# Altium PCB BABA03A.PcbDoc (part 1 of 2)
Units mm, origin at the board's own origin, x right, y up, seen from the top; angles counter-clockwise.
Board outline 201.01 x 71.02 mm, 2 copper layers (Top Layer, Bottom Layer); 178 components, 141 nets, 590 pads, 257 vias.
Unrouted connection lines stored in the file: 7.
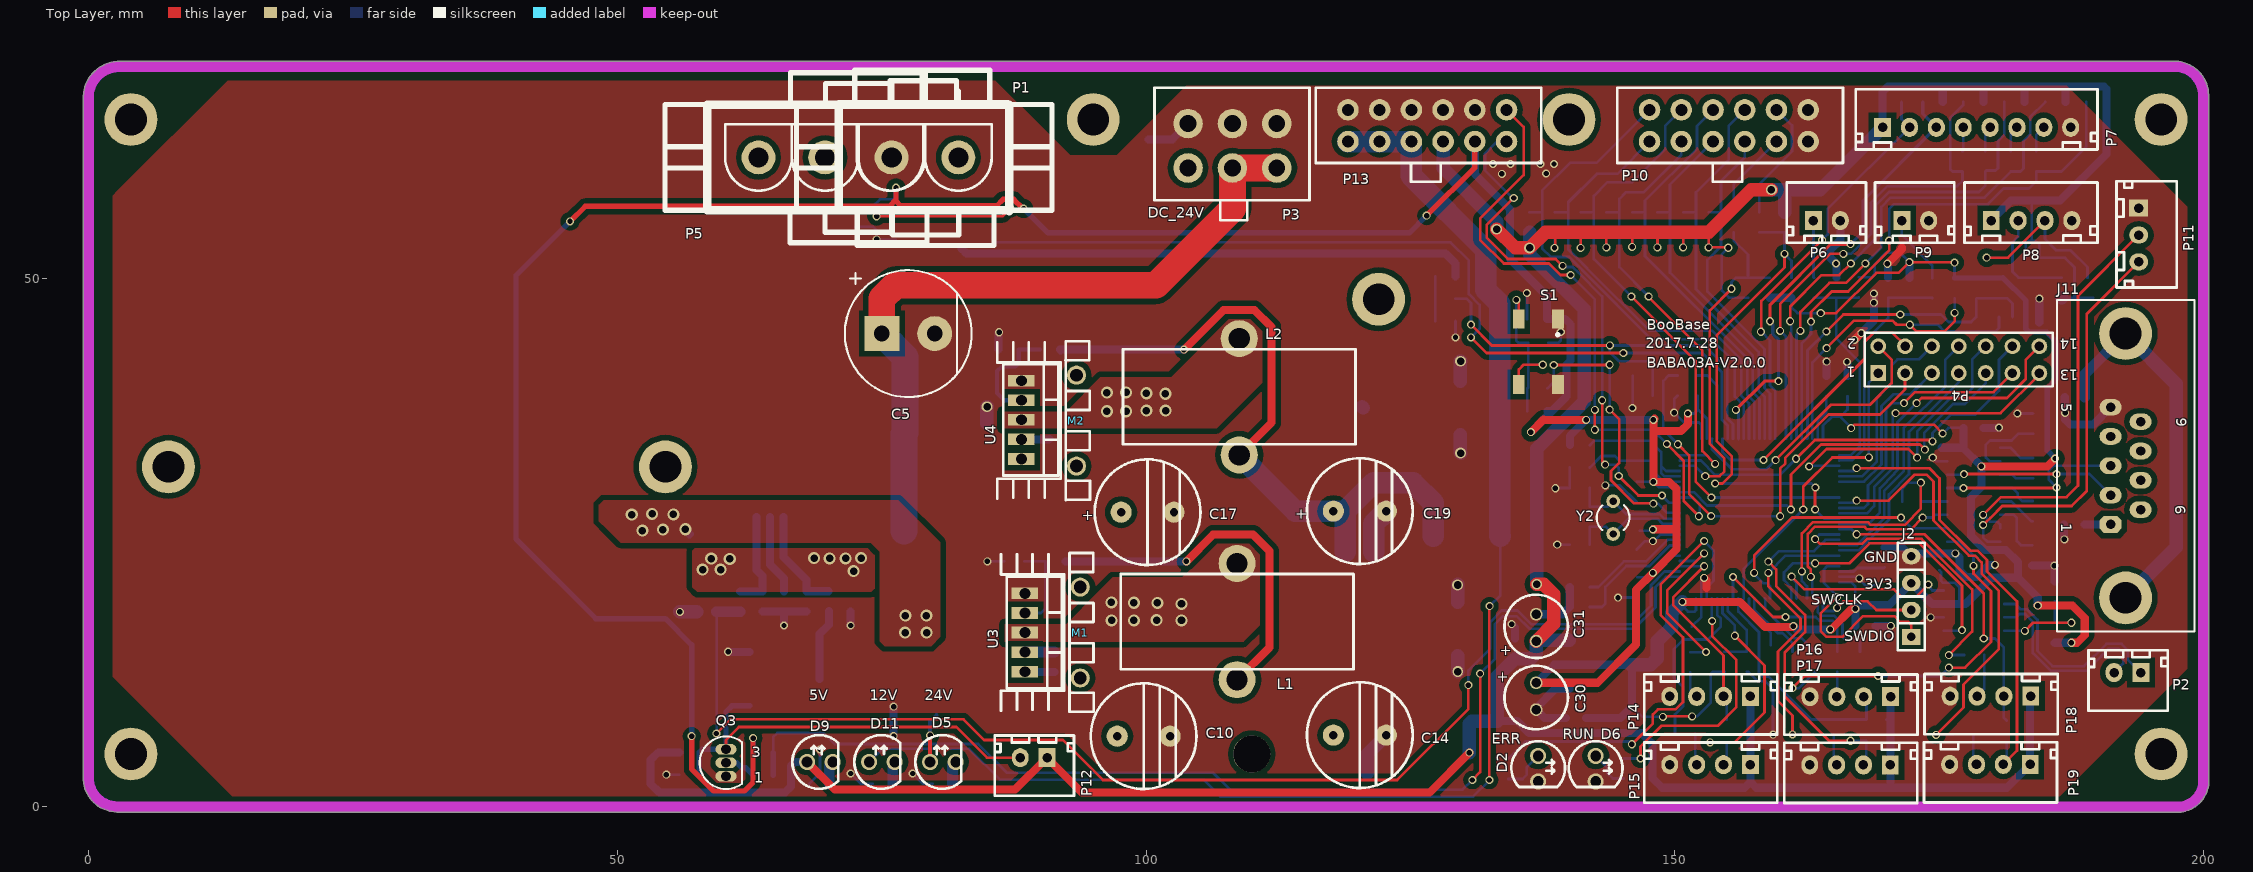
[diagram p0: Top Layer view]
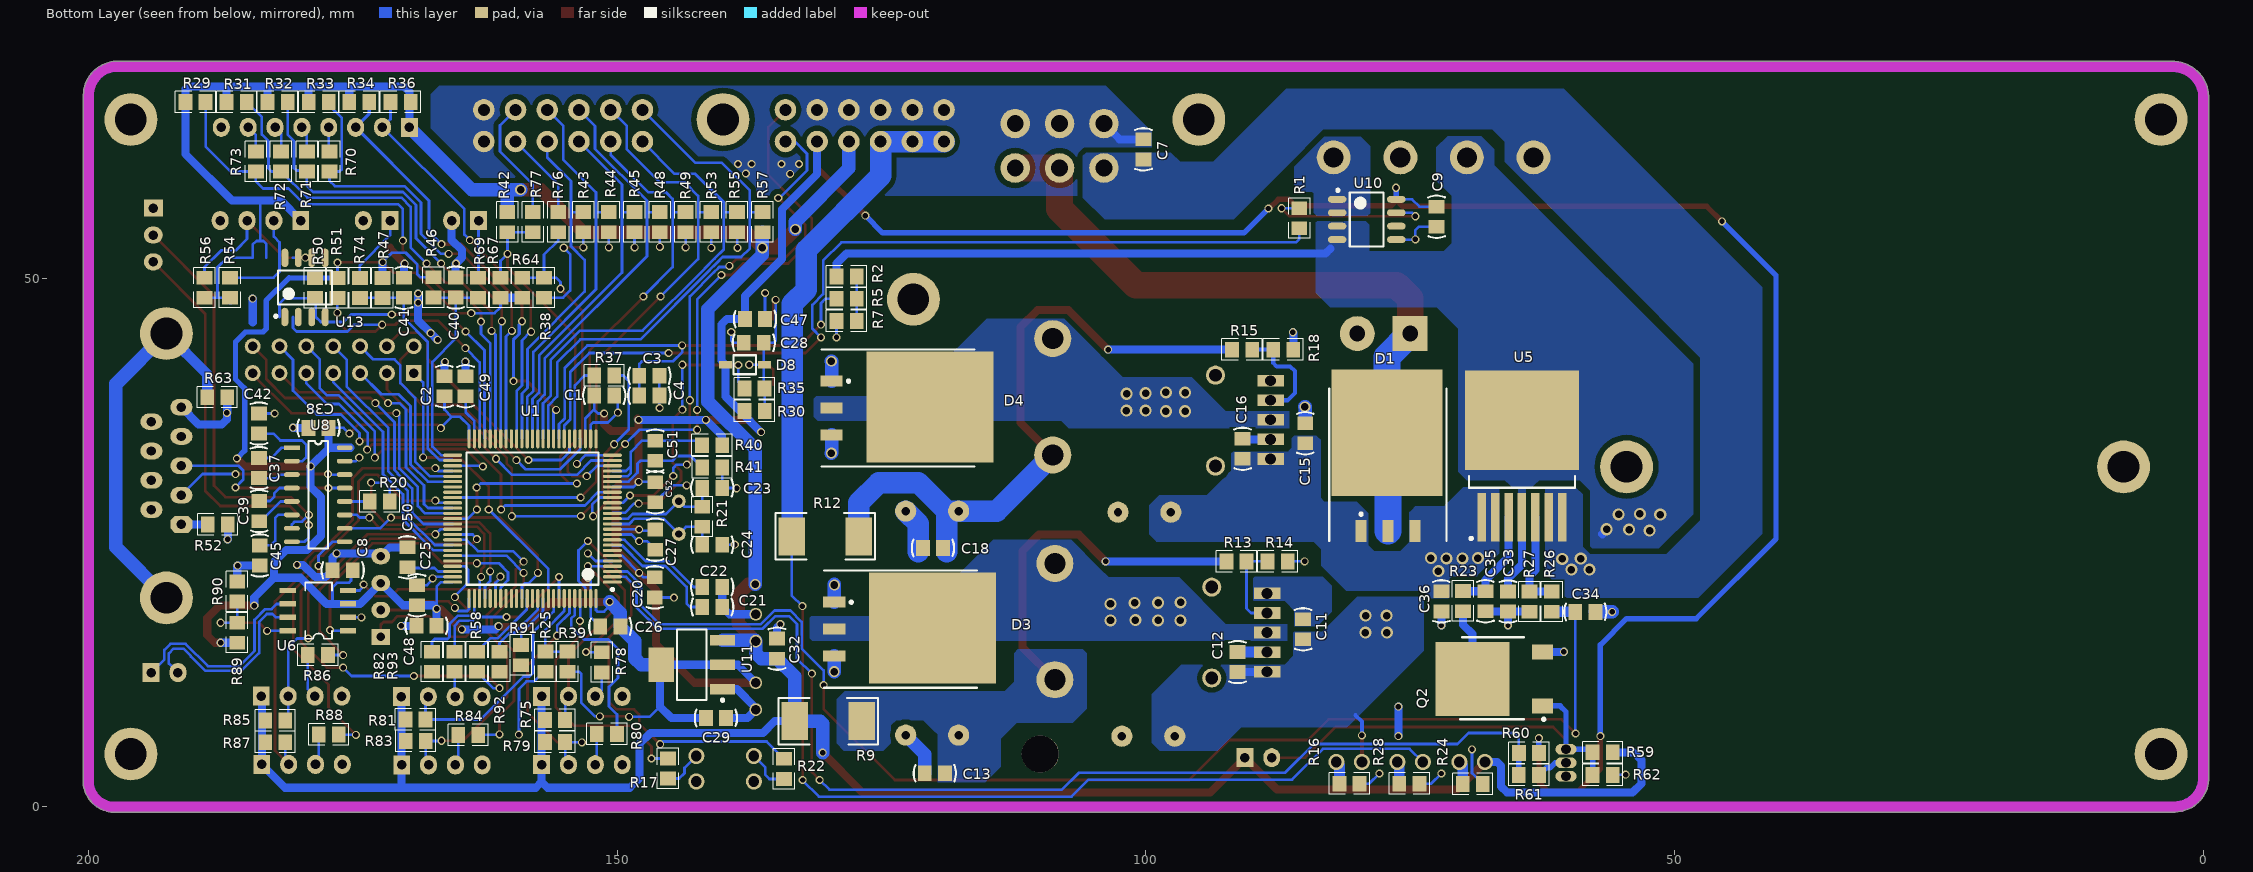
[diagram p1: Bottom Layer view, seen from below]

## Layer stack, top to bottom
Top Solder: solder mask 0.0102, Solder Resist, Dk 3.5
Top Layer: signal copper 0.0356
Dielectric1: prepreg 0.32, FR-4, Dk 4.8
Bottom Layer: signal copper 0.0356
Bottom Solder: solder mask 0.0102, Solder Resist, Dk 3.5

## Board outline
2.66,-0.488 cw(c2.715,2.737) -0.51,2.792 cw(c-0.01,2.783) -0.5,2.882 -0.5,66.846 cw(c-0.011,66.952) -0.511,66.929 cw(c2.901,67.086) 3.007,70.5 cw(c3.02,70) 3.02,70.5 197.212,70.5 cw(c197.212,70) 197.244,70.499 cw(c197.355,70.011) 197.369,70.511 cw(c197.278,67.304) 200.486,67.332 cw(c200,67.212) 200.5,67.212 200.5,2.556 cw(c200,2.556) 200.488,2.445 cw(c200,2.334) 200.5,2.334 cw(c200,2.334) 200.5,2.311 cw(c197.545,2.445) 197.411,-0.51 cw(c197.434,-0.01) 197.335,-0.5 2.774,-0.5 cw(c2.774,0) 2.664,-0.488 cw(c2.668,0.012)

## Design rules (kind name [scope] priority, off if disabled: settings)
Clearance poly [InPolygon] p1: gap=0.5
Clearance U5pintupin [InComponent('U5')] p2: gap=0.152
Clearance [All] p3: gap=0.178
ComponentClearance [All] p1 off: gap=0.254 collisioncheckmode=3 verticalgap=0.254 showdistances=FALSE
HoleSize [All] p1: absolutevalues=TRUE maxlimit=12.7 minlimit=0.025 maxpercent=80.000 minpercent=20.000
HoleToHoleClearance [All] p1: gap=0 allowstackedmicrovias=TRUE
MinimumSolderMaskSliver [All] p1: minsoldermaskwidth=0.152
PlaneConnect [All] p1: planeconnectstyle=Direct reliefexpansion=0.508 reliefentries=4 reliefconductorwidth=0.254 reliefairgap=0.254
PolygonConnect G [InNet('GND')] p1: connectstyle=Direct reliefconductorwidth=0.254 reliefentries=4 polygonreliefangle="90 Angle" airgapwidth=0.254
PolygonConnect NETD4_2 [InNet('NetD4_2')] p2: connectstyle=Direct reliefconductorwidth=0.254 reliefentries=4 polygonreliefangle="90 Angle" airgapwidth=0.254
PolygonConnect NETD4 [InNet('NetC13_2')] p3: connectstyle=Direct reliefconductorwidth=0.254 reliefentries=4 polygonreliefangle="90 Angle" airgapwidth=0.254
PolygonConnect NETD3_2 [InNet('NetD3_2')] p4: connectstyle=Direct reliefconductorwidth=0.254 reliefentries=4 polygonreliefangle="90 Angle" airgapwidth=0.254
PolygonConnect RELAY_IN [InNet('RELAY_IN')] p5: connectstyle=Direct reliefconductorwidth=0.254 reliefentries=4 polygonreliefangle="90 Angle" airgapwidth=0.254
PolygonConnect VCC_24V [InNet('VCC_24V')] p6: connectstyle=Direct reliefconductorwidth=0.254 reliefentries=4 polygonreliefangle="90 Angle" airgapwidth=0.254
PolygonConnect BATTIN [InNet('BATTIN')] p7: connectstyle=Direct reliefconductorwidth=0.254 reliefentries=4 polygonreliefangle="90 Angle" airgapwidth=0.254
PolygonConnect [All] p8: connectstyle=Direct reliefconductorwidth=0.254 reliefentries=4 polygonreliefangle="90 Angle" airgapwidth=0.254
RoutingVias [All] p1: holewidth=0.711 width=1.016 viastyle="Through Hole" minholewidth=0.508 minwidth=0.762 maxholewidth=0.762 maxwidth=1.27
SilkToSilkClearance [All] p1: silktosilkclearance=0
SilkToSolderMaskClearance [IsPad] p1: minsilkscreentomaskgap=0 clearancetoexposedcopper=TRUE
SolderMaskExpansion [All] p1: expansion=0.102
Width [All] p1: maxlimit=12.7 minlimit=0.254 preferedwidth=0.762
Width Width_4 [InNet('VCC_CONTROL')] p2: maxlimit=2.794 minlimit=2.286 preferedwidth=2.54
Width Width_3 [InNet('VCC_B1')] p3: maxlimit=2.794 minlimit=2.286 preferedwidth=2.54
Width Width_2 [InNet('VCC_B')] p4: maxlimit=2.794 minlimit=2.286 preferedwidth=2.54
Width Width_1 [InNet('VCC_ALL')] p5: maxlimit=2.794 minlimit=2.286 preferedwidth=2.54
23 further rules are at their usual default settings.

## Classes and differential pairs
component class POWER: 1 C3 C4 C5 C7 C9 C10 C11 C12 C13 C14 C15 C16 C17 C18 C19 C29 C30 C31 C32 C33 C34 C35 C36 D1 D3 D4 K3 L1 L2 M1 M2 M4 P1 P3 P5 Q2 Q3 R1 R2 R5 R7 R9 R12 R13 R14 R15 R18 R23 R26 R27 R59 R60 R61 R62 U3 U4 U5 U10 U11
component class MCU: C1 C2 C20 C21 C22 C23 C24 C25 C26 C27 C28 C47 C48 C49 C50 C51 C52 D2 D5 D6 D8 D9 D11 J2 R16 R17 R21 R22 R24 R25 R28 R30 R35 R37 R39 R40 R41 R91 R92 R93 S1 U1 Y2
component class CONNECTOR: C8 C37 C38 C39 C40 C41 C42 C45 F1 F2 J6 J7 J8 J9 J10 J11 P2 P4 P6 P7 P8 P9 P10 P11 P12 P13 P14 P15 P16 P17 P18 P19 R20 R29 R31 R32 R33 R34 R36 R38 R42 R43 R44 R45 R46 R47 R48 R49 R50 R51 R52 R53 R54 R55 R56 R57 R58 R63 R64 R67 R69 R70 R71 R72 R73 R74 R75 R76 R77 R78 R79 R80 R81 R82 R83 R84 R85 R86 R87 R88 R89 R90 U6 U8 U13 Z1 Z2

## Components (designator, comment, footprint, x,y, rotation, side; value= is the part's Value field where it differs from the comment)
C1 "Cap" C0805 151.232,38.887 r180 bottom
C2 "Cap" C0805 166.345,39.776 r90 bottom
C3 "Cap" C0805 146.964,40.767 r0 bottom
C4 "Cap" C0805 146.964,38.887 r0 bottom
C5 "Cap Pol1" 330uF 75.01,44.755 r0 top
C7 "Cap" C0805 100.228,62.179 r90 bottom
C8 "Cap" C0805 175.971,22.377 r180 bottom
C9 "Cap" C0805 72.517,55.804 r90 bottom
C10 "CIN" CTH-R5-D5 99.771,6.68 r0 top
C11 "Cap" C0805 85.141,16.789 r270 bottom
C12 "Cap" C0805 91.338,13.691 r270 bottom
C13 "Cap" C0805 119.964,3.175 r180 bottom
C14 "COUT" CTH-R5-D5 120.218,6.782 r0 top
C15 "Cap" C0805 84.938,35.331 r270 bottom
C16 "Cap" C0805 90.856,33.858 r270 bottom
C17 "CIN" CTH-R5-D5 100.141,27.864 r0 top
C18 "Cap" C0805 120.142,24.486 r180 bottom
C19 "COUT" CTH-R5-D5 120.218,27.965 r0 top
C20 "Cap" C0805 146.456,20.752 r270 bottom
C21 "NC(6pF)" C0805 141.021,18.898 r0 bottom
C22 "NC(6pF)" C0805 141.021,20.777 r0 bottom
C23 "8pF" C0805 141.011,30.15 r180 bottom
C24 "8pF" C0805 141.011,24.79 r180 bottom
C25 "Cap" C0805 168.935,20.015 r90 bottom
C26 "Cap" C0805 150.652,17.043 r0 bottom
C27 "Cap" C0805 146.406,25.273 r270 bottom
C28 "Cap" C0805 137.084,43.891 r180 bottom
C29 "Cap" C0805 140.665,8.407 r0 bottom
C30 "Cap Pol1" CTH-R3-D2.54 136.896,10.465 r90 top
C31 "Cap Pol1" CTH-R3-D2.54 136.896,16.942 r270 top
C32 "Cap" C0805 134.889,14.961 r270 bottom
C33 "Cap" C0805 65.761,19.416 r90 bottom
C34 "Cap" C0805 58.445,18.44 r180 bottom
C35 "Cap" C0805 67.894,19.441 r270 bottom
C36 "Cap" C0805 72.06,19.431 r90 bottom
C37 "Cap" C0805 183.885,32.04 r270 bottom
C38 "Cap" C0805 178.257,35.839 r180 bottom
C39 "Cap" C0805 183.859,27.965 r270 bottom
C40 "Cap" C0805 165.278,49.108 r90 bottom
C41 "Cap" C0805 170.18,49.088 r90 bottom
C42 "Cap" C0805 183.885,36.246 r270 bottom
C45 "Cap" C0805 183.808,23.774 r90 bottom
C47 "Cap" C0805 136.969,46.126 r180 bottom
C48 "Cap" C0805 168.036,17.12 r0 bottom
C49 "Cap" C0805 164.338,39.776 r90 bottom
C50 "Cap" C0805 169.85,23.597 r90 bottom
C51 "Cap" C0805 146.406,33.68 r270 bottom
C52 "Cap" C0805 146.406,29.754 r270 bottom
D1 "MBR30100" TO-263-3 77.112,30.302 r180 bottom
D2 "LED0" LED-H-R2.54 137.084,4.811 r270 top
D3 "MBR30100" TO-263-3 125.247,16.815 r270 bottom
D4 "MBR30100" TO-263-3 125.501,37.719 r270 bottom
D5 "LED0" LED-H-R2.54 79.578,4.242 r0 top
D6 "LED0" LED-H-R2.54 142.519,4.811 r270 top
D8 "Diode" 1206 136.068,41.808 r0 bottom
D9 "LED0" LED-H-R2.54 67.945,4.242 r0 top
D11 "LED0" LED-H-R2.54 73.812,4.242 r0 top
J2 "JTAG" PORT-SIP4-2.54 172.364,17.348 r90 top
J11 "DB9" DB9-TH-F-Z 192.638,32.264 r270 top
L1 "Inductor Iron" L2210 108.61,22.022 r270 top
L2 "Inductor Iron" L2210 108.814,43.282 r270 top
M1 "SRP" SRP-2-15*10 93.777,16.485 r90 top (schematic designator M2)
M2 "SRP" SRP-2-15*10 93.421,36.525 r90 top
P1 "POWERIN" DIP2*6.3 82.248,61.417 r180 top
P2 "CAN" XH2.54-2P 194.081,12.7 r180 top
P3 "Conn_2*3_4.2" PIN2X3_4.2 103.97,60.418 r90 top
P4 "Header 7X2" HDR2X7 169.24,41.021 r0 top
P5 "POWERIN" PORT-SIP4-6.3-LOCK 82.248,61.417 r180 top
P6 "ON" XH2.54-2P 163.119,55.448 r0 top
P7 "A-CHAR" XH2.54-8P 169.662,64.262 r0 top
P8 "SONAR" XH2.54-4P 179.934,55.448 r0 top
P9 "ESTOP" XH2.54-2P 171.475,55.448 r0 top
P10 "MOTTOR_Contol" PORT-DIP2X6-3-LOCK 147.619,62.916 r90 top
P11 "MOTOR" XH2.54-3P 193.878,56.617 r270 top
P12 "RELY1" XH2.54-2P 90.644,4.648 r180 top
P13 "V_OUT" PORT-DIP2X6-3-LOCK 119.092,62.916 r90 top
P14 "SONAR1" XH2.54-4P 157.15,10.439 r180 top
P15 "SONAR2" XH2.54-4P 157.15,3.988 r180 top
P16 "SONAR3" XH2.54-4P 170.409,10.414 r180 top
P17 "SONAR4" XH2.54-4P 170.383,3.962 r180 top
P18 "SONAR5" XH2.54-4P 183.667,10.465 r180 top
P19 "SONAR6" XH2.54-4P 183.617,4.013 r180 top
Q2 "AOD2910" TO252-D 65.811,12.09 r90 bottom
Q3 "9013" BCY-W3/E4 60.274,4.166 r0 top
R1 "Res1" R0805 85.496,55.662 r90 bottom
R2 "Res1" R0805 128.306,50.165 r180 bottom
R5 "Res1" R0805 128.306,48.057 r0 bottom
R7 "Res1" R0805 128.311,45.949 r0 bottom
R9 "Res1" 2512 130.048,8.103 r180 bottom
R12 "Res1" 2512 130.327,25.578 r180 bottom
R13 "Res1" R0805 91.44,23.216 r180 bottom
R14 "Res1" R0805 87.544,23.216 r180 bottom
R15 "Res1" R0805 90.907,43.231 r180 bottom
R16 "Res1" R0805 80.747,2.184 r0 bottom
R17 "Res1" R0805 145.186,3.622 r90 bottom
R18 "Res1" R0805 87.01,43.231 r180 bottom
R20 "Res1" R0805 172.466,28.88 r180 bottom
R21 "Res1" R0805 141.961,27.432 r270 bottom
R22 "Res1" R0805 134.239,3.592 r90 bottom
R23 "Res1" R0805 70.002,19.456 r90 bottom
R24 "Res1" R0805 69.088,2.159 r0 bottom
R25 "Res1" R0805 156.794,13.731 r90 bottom
R26 "Res1" R0805 61.62,19.406 r90 bottom
R27 "Res1" R0805 63.729,19.406 r90 bottom
R28 "Res1" R0805 75.082,2.184 r0 bottom
R29 "Res1" R0805 189.88,66.65 r180 bottom
R30 "Res1" R0805 137.008,37.44 r0 bottom
R31 "Res1" R0805 185.994,66.65 r180 bottom
R32 "Res1" R0805 182.118,66.65 r180 bottom
R33 "Res1" R0805 178.232,66.65 r180 bottom
R34 "Res1" R0805 174.396,66.65 r180 bottom
R35 "Res1" R0805 137.018,39.573 r180 bottom
R36 "Res1" R0805 170.485,66.65 r0 bottom
R37 "Res1" R0805 151.232,40.792 r180 bottom
R38 "Res1" R0805 156.921,49.098 r270 bottom
R39 "Res1" R0805 154.711,13.731 r270 bottom
R40 "Res1" R0805 141.026,34.202 r180 bottom
R41 "Res1" R0805 141.021,32.094 r180 bottom
R42 "Res1" R0805 160.401,55.296 r270 bottom
R43 "Res1" R0805 153.213,55.296 r270 bottom
R44 "Res1" R0805 150.8,55.296 r90 bottom
R45 "Res1" R0805 148.361,55.296 r270 bottom
R46 "Res1" R0805 167.386,49.124 r90 bottom
R47 "Res1" R0805 172.212,49.073 r90 bottom
R48 "Res1" R0805 145.974,55.296 r90 bottom
R49 "Res1" R0805 143.535,55.296 r270 bottom
R50 "Res1" R0805 178.58,49.063 r90 bottom
R51 "Res1" R0805 176.472,49.063 r90 bottom
R52 "Res1" R0805 187.782,26.708 r0 bottom
R53 "Res1" R0805 141.112,55.296 r90 bottom
R54 "Res1" R0805 186.607,49.098 r90 bottom
R55 "Res1" R0805 138.659,55.296 r270 bottom
R56 "Res1" R0805 189.027,49.098 r90 bottom
R57 "Res1" R0805 136.271,55.296 r90 bottom
R58 "Res1" R0805 163.271,13.716 r90 bottom
R59 "Res1" R0805 56.807,5.156 r0 bottom
R60 "Res1" R0805 63.779,5.105 r0 bottom
R61 "Res1" R0805 63.784,2.997 r0 bottom
R62 "Res1" R0805 56.807,3.023 r180 bottom
R63 "Res1" R0805 187.833,38.735 r0 bottom
R64 "Res1" R0805 158.979,49.098 r270 bottom
R67 "Res1" R0805 161.036,49.098 r90 bottom
R69 "Res1" R0805 163.17,49.098 r270 bottom
R70 "Res1" R0805 177.216,61.036 r270 bottom
R71 "Res1" R0805 179.349,61.036 r270 bottom
R72 "Res1" R0805 181.788,61.036 r270 bottom
R73 "Res1" R0805 184.175,61.036 r270 bottom
R74 "Res1" R0805 174.338,49.066 r270 bottom
R75 "Res1" R0805 155.88,8.23 r0 bottom
R76 "Res1" R0805 155.575,55.296 r270 bottom
R77 "Res1" R0805 157.988,55.296 r90 bottom
R78 "Res1" R0805 151.46,13.665 r90 bottom
R79 "Res1" R0805 155.88,6.121 r0 bottom
R80 "Res1" R0805 150.978,6.883 r180 bottom
R81 "Res1" R0805 169.078,8.255 r0 bottom
R82 "Res1" R0805 165.379,13.716 r90 bottom
R83 "Res1" R0805 169.062,6.223 r0 bottom
R84 "Res1" R0805 164.084,6.807 r180 bottom
R85 "Res1" R0805 182.347,8.153 r0 bottom
R86 "Res1" R0805 178.308,14.376 r180 bottom
R87 "Res1" R0805 182.347,6.113 r0 bottom
R88 "Res1" R0805 177.277,6.833 r180 bottom
R89 "Res1" R0805 185.939,16.459 r90 bottom
R90 "Res1" R0805 185.939,20.371 r90 bottom
R91 "Res1" R0805 159.09,14.351 r270 bottom
R92 "Res1" R0805 161.138,13.716 r270 bottom
R93 "Res1" R0805 167.513,13.716 r270 bottom
S1 "SW-PB4" RESET-SMD-1O4 137.109,43.028 r270 top
U1 "STM32F407VG" 100T1_N 158.013,27.254 r0 bottom
U3 "XL4016" TO220-5 88.544,16.485 r270 top
U4 "XL4016" TO220-5 88.214,36.601 r270 top
U5 "BTS50085-1TMA" TO127P1385X450-8N-V 64.44,31.979 r90 bottom
U6 "SN65HVD230" SO8-SN65HVD230 178.308,18.554 r90 bottom
U8 "MAX3232ESE" SOP16 180.772,33.96 r180 bottom
U10 "ACS711ELCTR-25AB-T" ACS712-SOIC8 79.121,55.55 r180 bottom
U11 "ASM1117-3V3" ASM1117-3V3 142.941,13.437 r0 bottom
U13 "PCA9306" ACS712-SOIC8 179.527,49.125 r90 bottom
Y2 "8MHz" CLK_3.1 144.171,27.356 r0 top

## Footprints (in the part's own frame and the unit in brackets; to place one, negate y for a bottom-side part, rotate by r counter-clockwise, add the part's x,y. Pads: shape width x height; smd on the part's side, far side on the other; paste and mask are expansions set on the pad)
100T1_N [mm] "Thin QFP, 100-Leads, Body 14x14mm, Pitch 0.5mm, IPC Medium Density"
  oval 1.8x0.3 smd: 1(-7.55,6) 2(-7.55,5.5) 3(-7.55,5) 4(-7.55,4.5) 5(-7.55,4) 6(-7.55,3.5) 7(-7.55,3) 8(-7.55,2.5) 9(-7.55,2) 10(-7.55,1.5) 11(-7.55,1) 12(-7.55,0.5) 13(-7.55,0) 14(-7.55,-0.5) 15(-7.55,-1) 16(-7.55,-1.5) 17(-7.55,-2) 18(-7.55,-2.5) 19(-7.55,-3) 20(-7.55,-3.5) 21(-7.55,-4) 22(-7.55,-4.5) 23(-7.55,-5) 24(-7.55,-5.5) 25(-7.55,-6) 51(7.55,-6) 52(7.55,-5.5) 53(7.55,-5) 54(7.55,-4.5) 55(7.55,-4) 56(7.55,-3.5) 57(7.55,-3) 58(7.55,-2.5) 59(7.55,-2) 60(7.55,-1.5) 61(7.55,-1) 62(7.55,-0.5) 63(7.55,0) 64(7.55,0.5) 65(7.55,1) 66(7.55,1.5) 67(7.55,2) 68(7.55,2.5) 69(7.55,3) 70(7.55,3.5) 71(7.55,4) 72(7.55,4.5) 73(7.55,5) 74(7.55,5.5) 75(7.55,6)
  oval 0.3x1.8 smd: 26(-6,-7.55) 27(-5.5,-7.55) 28(-5,-7.55) 29(-4.5,-7.55) 30(-4,-7.55) 31(-3.5,-7.55) 32(-3,-7.55) 33(-2.5,-7.55) 34(-2,-7.55) 35(-1.5,-7.55) 36(-1,-7.55) 37(-0.5,-7.55) 38(0,-7.55) 39(0.5,-7.55) 40(1,-7.55) 41(1.5,-7.55) 42(2,-7.55) 43(2.5,-7.55) 44(3,-7.55) 45(3.5,-7.55) 46(4,-7.55) 47(4.5,-7.55) 48(5,-7.55) 49(5.5,-7.55) 50(6,-7.55) 76(6,7.55) 77(5.5,7.55) 78(5,7.55) 79(4.5,7.55) 80(4,7.55) 81(3.5,7.55) 82(3,7.55) 83(2.5,7.55) 84(2,7.55) 85(1.5,7.55) 86(1,7.55) 87(0.5,7.55) 88(0,7.55) 89(-0.5,7.55) 90(-1,7.55) 91(-1.5,7.55) 92(-2,7.55) 93(-2.5,7.55) 94(-3,7.55) 95(-3.5,7.55) 96(-4,7.55) 97(-4.5,7.55) 98(-5,7.55) 99(-5.5,7.55) 100(-6,7.55)
  silkscreen extent -7.67,-6.25 6.25,6.82, body extent -7,-7 7,7, height 1.05
330uF [mm]
  rect 3.3x3.3 hole 1.5: 1(0,0)
  round 3.3 hole 1.5: 2(5,0)
  silkscreen extent -3.5,-6 8.5,6
1206 [mm]
  rect 1.2x0.7 smd: 1(0,0) 2(3.7,0)
  silkscreen extent 0.81,-0.9 2.95,0.9
2512 [mm] "贴片元件"
  rect 2.5x3.6 smd: 1(-3.175,0) 2(3.175,0)
  silkscreen extent -4.7,-2.2 4.7,2.2, body extent -3.18,-1.65 3.18,1.65, height 1.2
ACS712-SOIC8 [mm] "SOP, 8-Leads, Body 4.90x3.90mm, Pitch 1.27mm, IPC Medium Density"
  oval 1.75x0.65 smd: 1(-2.8,1.905) 2(-2.8,0.635) 3(-2.8,-0.635) 4(-2.8,-1.905) 5(2.8,-1.905) 6(2.8,-0.635) 7(2.8,0.635) 8(2.8,1.905)
  silkscreen extent -2.85,-2.55 1.6,2.88
ASM1117-3V3 [mm]
  rect 2.4x1 smd: 1(-2.9,2.3) 2(-2.9,0) 3(-2.9,-2.3)
  rect 2.4x3.3 smd: 4(2.9,0)
  silkscreen extent -3.02,-3.35 1.4,3.47, body extent -1.85,-3.35 1.85,3.35, height 1.7
BCY-W3/E4 [mm] "TO, Flat Index; 3 In-Line, Axial Leads; Body Dia. 4.5mm; Leads 0.51 x 0.48 mm (max)"
  oval 2x1 hole 0.9: 1(0,-1.27) 2(0,0) 3(0,1.27)
  silkscreen extent -2.48,-2.48 1.5,2.48
C0805 [mm] "贴片电容0805"
  rect 1.3x1.5 smd: 1(-0.95,0) 2(0.95,0)
  silkscreen extent -2,-0.79 2,0.79, body extent -1.27,-0.64 1.27,0.64, height 0.9
CLK_3.1 [mm] "Crystal, Thru-Hole; 2 Leads; Body 3.1 x 8.2 mm (Dia.xH)"
  round 1.3 hole 0.7: 1(0,1.55) 2(0,-1.55)
  silkscreen extent -1.55,-1.19 1.55,1.17
CTH-R3-D2.54 [mm] "直插电解电容直径6mm间距2.54mm"
  round 1.2 hole 0.9: 1(1.27,0) 2(-1.27,0)
  silkscreen extent -3.13,-3 2.87,3
CTH-R5-D5 [mm]
  round 2 hole 0.8: 1(-2.5,0) 2(2.5,0)
  silkscreen extent -5,-5 5,5
DB9-TH-F-Z [mil]
  oct 62x82 hole 35: 1(218.75,-55.83)
  oval 62x82 hole 35: 2(109.58,-55.83) 3(0.42,-55.83) 4(-108.75,-55.83) 5(-217.92,-55.83) 6(163.75,55.83) 7(54.58,55.83) 8(-54.58,55.83)
  oval 60x82 hole 35: 9(-163.75,55.83)
  round 196.67 hole 118.33: 10(492.08,0) 11(-492.08,0)
  silkscreen extent -616,-256 617,256
DIP2*6.3 [mm]
  round 3.2 hole 1.9: 1(0,0) 2(6.327,0)
  silkscreen extent -8.85,-8.25 15.3,8.33
HDR2X7 [mm] "Connector; Header; 7x2 Position"
  rect 1.5x1.5 hole 0.9: 1(0,0)
  round 1.5 hole 0.9: 2(0,2.54) 3(2.54,0) 4(2.54,2.54) 5(5.08,0) 6(5.08,2.54) 7(7.62,0) 8(7.62,2.54) 9(10.16,0) 10(10.16,2.54) 11(12.7,0) 12(12.7,2.54) 13(15.24,0) 14(15.24,2.54)
  silkscreen extent -1.27,-1.27 16.51,3.81
L2210 [mm]
  round 3.5 hole 2: 1(-1,0) 2(10,0)
  silkscreen extent 0,-11 9,11
LED-H-R2.54 [mil]
  round 60 hole 40: 1(0,0) 2(95,0)
  silkscreen extent -55,-100 116,100
PIN2X3_4.2 [mil]
  round 110 hole 62: 1(0,0) 2(0,-165.35) 3(0,-330.71) 4(165.35,-330.71) 5(165.35,-165.35) 6(165.35,0)
  silkscreen extent -195,-452 299,125, body extent -120,-455 300,125, height 500
PORT-DIP2X6-3-LOCK [mil]
  round 80 hole 45: 1(0,0) 2(0,-118.11) 3(0,-236.22) 4(0,-354.33) 5(0,-472.44) 6(0,-590.55) 7(118.11,-590.55) 8(118.11,-472.44) 9(118.11,-354.33) 10(118.11,-236.22) 11(118.11,-118.11) 12(118.11,0)
  silkscreen extent -150,-720 200,120
PORT-SIP4-2.54 [mil]
  rect 60x70 hole 32: 1(-50,0)
  oval 60x70 hole 32: 2(50,0) 3(150,0) 4(250,0)
  silkscreen extent -100,-50 300,50
PORT-SIP4-6.3-LOCK [mm]
  round 3.2 hole 1.9: 1(0,0) 2(6.3,0) 3(12.6,0) 4(18.9,0)
  silkscreen extent -8.85,-8 27.75,8.08
R0805 [mm] "贴片带丝印"
  rect 1.3x1.5 smd: 1(-0.95,0) 2(0.95,0)
  silkscreen extent -1.91,-1.02 1.91,1.02, body extent -1.14,-0.51 1.14,0.51, height 1
RESET-SMD-1O4 [mm]
  rect 1.8x1.1 smd: 1(-3.1,1.85) 2(-3.1,-1.85) 3(3.1,-1.85) 4(3.1,1.85)
  silkscreen extent -1.75,1.7 -1.5,1.95, body extent -4.07,-2.52 4.11,2.42, height 1.1
SO8-SN65HVD230 [mil]
  rect 20x60 smd: 1(-75,-112.5) 2(-25,-112.5) 3(25,-112.5) 4(75,-112.5) 5(75,112.5) 6(25,112.5) 7(-25,112.5) 8(-75,112.5)
  silkscreen extent -105,-53 105,48
SOP16 [mm]
  rect 1.5x0.45 smd: 1(0,0)
  oval 1.5x0.45 smd: 2(0,-1.27) 3(0,-2.54) 4(0,-3.81) 5(0,-5.08) 6(0,-6.35) 7(0,-7.62) 8(0,-8.89) 9(5,-8.89) 10(5,-7.62) 11(5,-6.35) 12(5,-5.08) 13(5,-3.81) 14(5,-2.54) 15(5,-1.27) 16(5,0)
  silkscreen extent 1.58,-9.53 3.42,0.63, body extent 0.89,-9.4 4.19,0.51, height 1.8
SRP-2-15*10 [mm]
  round 1.8 hole 1.2: 1(-4.3,0) 2(4.3,0)
  silkscreen extent -7.5,-1.27 7.52,7.5
TO127P1385X450-8N-V [mm] "TO,1.27mm pitch;7 pin,13.85mm L X 9.25mm W X 4.50mm H body"
  rect 4.6x0.8 smd paste+0 mask+0: 1(-4.575,3.81) 2(-4.575,2.54) 3(-4.575,1.27) 4(-4.575,0) 5(-4.575,-1.27) 6(-4.575,-2.54) 7(-4.575,-3.81)
  rect 9.4x10.8 smd paste+0 mask+0: 8(4.575,0)
  silkscreen extent -6.72,-5 -0.7,5, body extent -5.72,-5 8.13,5, height 4.51
TO220-5 [mm]
  rect 1.1x2.5 hole 1.02: 1(-3.7,0) 2(-1.85,0) 3(0,0) 4(1.85,0) 5(3.7,0)
  silkscreen extent -5.27,-1.73 5.27,3.5
TO252-D [mm] "D2-PAK"
  rect 1.4x2 smd: 1(-2.54,-3.302) 2(2.54,-3.302)
  rect 7x7 smd: 3(0,3.302)
  silkscreen extent -3.93,-3.55 3.94,4.47, body extent -3.27,-3.81 3.27,6.13, height 2.39
TO-263-3 [mm] "LM2940/LM1086"
  rect 1.05x2.1 smd: 1(-2.54,-4.225) 2(0,-4.225) 3(2.54,-4.225)
  rect 10.5x12 smd: 2(-0.104,5.08)
  silkscreen extent -5.55,-5.17 5.55,9.28, body extent -5.33,-4.7 5.33,9.27, height 1.6
XH2.54-2P [mm]
  rect 1.6x1.8 hole 0.9: 1(0,0)
  oval 1.6x1.8 hole 0.9: 2(2.54,0)
  silkscreen extent -2.54,-2.1 4.96,3.6
XH2.54-3P [mm]
  rect 1.6x1.8 hole 0.9: 1(0,0)
  oval 1.6x1.8 hole 0.9: 2(2.54,0) 3(5.08,0)
  silkscreen extent -2.54,-2.1 7.5,3.6
XH2.54-4P [mm]
  rect 1.6x1.8 hole 0.9: 1(0,0)
  oval 1.6x1.8 hole 0.9: 2(2.54,0) 3(5.08,0) 4(7.62,0)
  silkscreen extent -2.54,-2.1 10.04,3.6
XH2.54-8P [mm]
  rect 1.6x1.8 hole 0.9: 1(0,0)
  oval 1.6x1.8 hole 0.9: 2(2.54,0) 3(5.08,0) 4(7.62,0) 5(10.16,0) 6(12.7,0) 7(15.24,0) 8(17.78,0)
  silkscreen extent -2.54,-2.1 20.32,3.6

## Part data
C1 C2 C3 C4 C7 C8 C9 C11 C12 C13 C15 C18 C20 C25 C26 C27 C28 C29 C32 C33 C34 C35 C36 C37 C38 C39 C40 C41 C42 C45 C47 C48 C49 C50 C51 C52: "Capacitor"
C5 C30 C31: "Polarized Capacitor (Radial)"
C10 C14 C17 C19: library part "Cap Pol1", "Polarized Capacitor (Radial)"
C16: "CC"
C21 C22 C23 C24: library part Cap, "Capacitor"
D1 D3 D4: "Dual Diode"
D2 D5 D6 D9 D11: "发光二极管"
D8: "二极管"
J2 P8 P14 P15 P16 P17 P18 P19: library part Conn_1*4_1
J11: library part "D Connector 9", "串口"
L1 L2: "Magnetic-Core Inductor"
M1 M2: library part SRP-1
P1: library part "Header 2", "Conn6.3_1*2"
P2 P6 P9 P12: library part Conn_1*2
P4: "Header, 7-Pin, Dual row"
P5: library part CONN_4PIN
P7: library part Conn_1*8
P10 P13: library part Conn_2*6
P11: library part Conn_1*3
Q2: library part MOSFET-N, "N-Channel MOSFET"
Q3: library part 2N3904, "NPN General Purpose Amplifier"
R1 R2 R5 R7 R9 R12 R13 R14 R15 R16 R17 R18 R20 R21 R22 R23 R24 R25 R26 R27 R28 R29 R30 R31 R32 R33 R34 R35 R36 R37 R38 R39 R40 R41 R42 R43 R44 R45 R46 R47 R48 R49 R50 R51 R52 R53 R54 R55 R56 R57 R58 R59 R60 R61 R62 R63 R64 R67 R69 R70 R71 R72 R73 R74 R75 R76 R77 R78 R79 R80 R81 R82 R83 R84 R85 R86 R87 R88 R89 R90 R91 R92 R93: "Resistor"
S1: "微动开关"
U3 U4: "BUCK DCDC"
U5: "Smart Highside High Current Power Switch, VBB 70V"
U6: library part SN65HVD230D
U8: "+5V Powered, Multi-Channel RS-232 Driver/Receiver"
U10: library part ACS711
U11: library part LDO
Y2: library part XTAL, "X1A0000610030xx"

## Free pads (board coordinates)
  round 5 hole 3: 0(4,5) 0(4,65) 0(7.544,32.156) 0(54.544,32.156) 0(95,65) 0(122,48) 0(140,65) 0(196,5) 0(196,65)
  round 3.5 hole 3.5: 0(110,5)

## Via types
v1: diameter 0.762, hole 0.508, Top Layer to Bottom Layer, tented both sides, 213 vias
v2: diameter 1.143, hole 0.711, Top Layer to Bottom Layer, tented both sides, 35 vias
v3: diameter 1.016, hole 0.711, Top Layer to Bottom Layer, tented both sides, 9 vias

## Nets (pads, with @x,y where several pads share a name; then routed paths per layer and width w, separated by ;. In a path a pad name is that pad's centre, name@x,y a point inside that pad or via, vN(x,y) a via of type N, cw(c..) or ccw(c..) an arc to the next point about the centre after c; other vN are vias at no path point)
BATTIN: P1.1 P5.1 U10.1 U10.2 | length 0.6
  Bottom Layer w1.27: P1.1@81.845,61.014 P1.1@82.248,61.417
BK_L: P10.1 R55.1 U1.36 | length 44.3
  Bottom Layer w0.254: R55.1@138.659,56.246 139.868,56.246 139.929,56.185 ; P10.1@147.619,62.916 144.571,59.868 142.621,59.868 139.929,57.175 139.929,56.185 ; U1.36@157.013,34.804 157.013,38.16 156.286,38.887 156.286,42.291 153.543,45.034 147.599,45.034 141.707,50.927 141.707,50.934 140.799,51.841 140.792,51.841 139.929,52.705 139.929,56.185
BK_R: P10.12 R57.2 U1.35 | length 50.2
  Bottom Layer w0.254: R57.2@136.271,56.246 137.429,56.246 137.465,56.21 ; P10.12@147.619,65.916 142.613,60.909 140.106,60.909 137.465,58.268 137.465,56.21 ; U1.35@156.513,34.804 156.513,37.973 155.677,38.81 155.677,42.012 153.477,44.211 147.812,44.211 141.275,50.748 141.275,50.755 140.62,51.41 140.613,51.41 140.029,51.994 138.278,51.994 137.465,52.807 137.465,56.21
BLDC_24V: C5.1 D1.2 P3.2 P3.3 | length 67.7
  Top Layer w2.54: C5.1@75.01,44.755 75.01,48.061 76.276,49.327 100.94,49.327 108.17,56.557 P3.2@108.17,60.418 P3.3@112.37,60.418
  Bottom Layer w2.54: C5.1@75.01,44.755 77.216,42.549 D1.2@77.216,35.382 77.112,35.278 D1.2@77.112,26.077
BUTTON: C40.1 R46.1 R69.2 U1.51 | length 21.5
  Bottom Layer w0.254: R69.2@163.17,48.148 C40.1@165.278,48.148 ; C40.1@165.278,48.158 C40.1@165.278,48.148 ; U1.51@165.563,33.254 166.658,33.254 167.488,34.084 167.488,42.062 165.278,44.272 C40.1@165.278,48.148 ; R46.1@167.386,48.174 167.361,48.148 C40.1@165.278,48.148
CAN1_RX: U1.81 U6.4 | length 18.2
  Top Layer w0.254: v1(161.061,21.768) 162.255,20.574 170.749,20.574 171.41,19.914 172.872,19.914 v1(173.99,21.031)
  Bottom Layer w0.254: v1(161.061,21.768) 161.061,21.63 161.513,21.178 U1.81@161.513,19.704 ; v1(173.99,21.031) 173.99,20.827 174.358,20.459 U6.4@175.451,20.459
CAN1_TX: U1.82 U6.1 | length 28.3
  Top Layer w0.254: v1(163.271,23.038) 166.522,23.038 168.402,24.917 173.156,24.917 177.165,20.908 v1(177.165,16.713)
  Bottom Layer w0.254: U1.82@161.013,19.704 161.013,20.752 160.325,21.44 160.325,22.174 161.188,23.038 v1(163.271,23.038) ; U6.1@175.451,16.649 177.101,16.649 v1(177.165,16.713)
CANH: P2.2 U6.7 | length 18.5
  Bottom Layer w0.254: U6.7@181.165,17.919 182.283,17.919 182.601,18.237 183.134,18.237 183.871,17.501 183.871,14.554 185.547,12.878 188.976,12.878 190.322,14.224 190.322,14.249 191.033,14.961 191.948,14.961 192.405,14.503 192.405,13.564 P2.2@191.541,12.7
CANL: P2.1 U6.6 | length 19.6
  Bottom Layer w0.254: U6.6@181.165,19.189 182.207,19.189 182.702,18.694 183.287,18.694 184.302,17.679 184.302,14.733 185.725,13.31 188.723,13.31 190.83,15.418 192.253,15.418 192.837,14.834 192.837,13.945 P2.1@194.081,12.7
CHAR_V: P7.3 R34.2 U1.34 | length 42.9
  Top Layer w0.3: v1(155.778,37.541) 158.496,40.259 v1(159.817,40.259) ; v1(159.013,45.923) 159.013,47.502 164.725,53.213 v1(166.624,53.213)
  Bottom Layer w0.3: v1(155.778,37.541) 156.013,37.306 U1.34@156.013,34.804 ; v1(159.013,45.923) 158.979,45.888 159.26,45.607 159.26,44.715 159.817,44.159 v1(159.817,40.259) ; v1(166.624,53.213) 167.818,54.407 167.818,57.338 P7.3@174.742,64.262 173.446,65.557 R34.2@173.446,66.65
E-STOP: C41.1 R47.1 R74.2 U1.52 | length 22.2
  Bottom Layer w0.254: U1.52@165.563,32.754 165.609,32.799 166.814,32.799 167.919,33.905 167.919,43.967 170.18,46.228 C41.1@170.18,48.138 174.316,48.138 R74.2@174.338,48.116
ECHO1: R78.2 U1.5 | length 16.4
  Top Layer w0.254: v1(152.781,23.978) 149.276,20.472 149.276,18.324 v1(152.959,14.641)
  Bottom Layer w0.254: U1.5@150.463,23.254 152.058,23.254 v1(152.781,23.978) ; R78.2@151.46,14.615 152.933,14.615 v1(152.959,14.641)
ECHO2: R80.2 U1.96 | length 16.8
  Bottom Layer w0.254: R80.2@150.028,6.883 150.028,8.753 150.774,9.5 150.774,11.354 149.936,12.192 149.936,14.922 150.838,15.824 153.123,15.824 154.356,17.057 154.356,17.816 154.013,18.158 U1.96@154.013,19.704
ECHO3: R82.2 U1.93 | length 16.5
  Top Layer w0.254: v1(155.513,21.742) 159.298,17.958 v1(160.477,17.958)
  Bottom Layer w0.254: U1.93@155.513,19.704 155.513,21.554 155.702,21.742 v1(155.513,21.742) ; v1(160.477,17.958) 163.322,17.958 163.678,17.602 164.897,17.602 165.379,17.12 R82.2@165.379,14.666
ECHO4: R84.2 U1.70 | length 27.4
  Top Layer w0.254: v1(158.852,22.123) 158.852,20.853 161.9,17.805 161.9,16.81 159.766,14.677 159.766,10.008 161.138,8.636 v1(161.138,6.858)
  Bottom Layer w0.254: v1(158.852,22.123) 160.482,23.754 U1.70@165.563,23.754 ; v1(161.138,6.858) 161.188,6.807 R84.2@163.134,6.807
ECHO5: R86.2 U1.66 | length 28.3
  Top Layer w0.254: v1(163.271,25.324) 163.728,24.867 167.716,24.867 168.199,25.349 173.355,25.349 178.13,20.574 178.13,16.561 v1(175.92,14.351)
  Bottom Layer w0.254: v1(163.271,25.324) 163.271,25.349 163.678,25.756 165.562,25.756 U1.66@165.563,25.754 ; v1(175.92,14.351) 177.383,14.351 R86.2@177.358,14.376
ECHO6: R88.2 U1.60 | length 41.2
  Top Layer w0.254: v1(167.208,28.956) 170.231,28.956 172.695,31.42 173.812,31.42 174.473,30.759 174.473,27.09 177.814,23.749 178.384,23.749 179.019,23.114 179.019,22.047 180.645,20.422 180.645,14.91 177.307,11.572 177.307,9.388 v1(174.727,6.807)
  Bottom Layer w0.254: U1.60@165.563,28.754 167.006,28.754 v1(167.208,28.956) ; v1(174.727,6.807) 176.301,6.807 R88.2@176.327,6.833
EN_L: P10.3 R45.1 U1.38 | length 34.5
  Bottom Layer w0.254: R45.1@148.361,56.246 149.489,56.246 149.555,56.312 ; P10.3@153.619,62.916 149.555,58.852 149.555,56.312 ; U1.38@158.013,34.804 158.013,38.557 157.378,39.192 157.378,42.697 149.555,50.521 149.555,56.312
EN_R: P10.10 R48.2 U1.37 | length 39.3
  Bottom Layer w0.254: R48.2@145.974,56.246 147.178,56.246 147.193,56.261 ; P10.10@153.619,65.916 152.095,64.392 152.095,62.23 147.193,57.328 147.193,56.261 ; U1.37@157.513,34.804 157.513,38.346 156.87,38.989 156.87,42.393 147.193,52.07 147.193,56.261
ENCO_B_L: P4.12 U1.24 | length 39.4
  Top Layer w0.254: v1(161.468,32.918) 163.246,34.696 174.244,34.696 v1(174.371,34.569)
  Bottom Layer w0.254: U1.24@150.463,32.754 152.463,32.754 153.822,31.394 159.944,31.394 v1(161.468,32.918) ; v1(174.371,34.569) 174.371,35.357 176.124,37.109 178.41,37.109 180.663,39.363 180.663,42.284 P4.12@181.94,43.561
ENCO_B_R: P4.14 U1.64 | length 31
  Top Layer w0.254: v1(172.872,38.176) 173.355,38.659 181.407,38.659 183.185,40.437 183.185,42.266 P4.14@184.48,43.561
  Bottom Layer w0.254: U1.64@165.563,26.754 168.308,26.754 169.393,27.838 169.393,30.124 170.751,31.483 170.751,31.533 171.069,31.851 171.069,36.373 v1(172.872,38.176)
ENCO_Z_L: P4.11 U1.61 | length 25.9
  Top Layer w0.254: v1(171.679,38.176) 172.72,39.218 180.137,39.218 P4.11@181.94,41.021
  Bottom Layer w0.254: U1.61@165.563,28.254 167.903,28.254 168.275,28.626 168.275,30.404 169.977,32.106 169.977,37.567 170.586,38.176 v1(171.679,38.176)
ENCO_Z_R: P4.13 U1.62 | length 28.5
  Top Layer w0.254: v1(170.891,37.236) 180.824,37.236 184.48,40.893 P4.13@184.48,41.021
  Bottom Layer w0.254: U1.62@165.563,27.754 168.178,27.754 168.859,28.435 168.859,30.251 170.612,32.004 170.612,36.957 v1(170.891,37.236)
FR_L: P10.4 R43.1 U1.40 | length 33.2
  Bottom Layer w0.254: R43.1@153.213,56.246 154.366,56.246 154.381,56.261 ; P10.4@156.619,62.916 156.619,61.42 154.381,59.182 154.381,56.261 ; U1.40@159.013,34.804 159.013,39.091 158.496,39.608 158.496,43.307 153.086,48.717 153.086,51.729 154.374,53.018 154.374,56.254 154.381,56.261
FR_R: P10.9 R44.2 U1.39 | length 36.9
  Bottom Layer w0.254: R44.2@150.8,56.246 151.978,56.246 152.013,56.21 ; P10.9@156.619,65.916 155.118,64.414 155.118,61.214 152.013,58.11 152.013,56.21 ; U1.39@158.513,34.804 158.513,38.768 157.937,39.345 157.937,43.028 152.013,48.951 152.013,56.21
GND: C1.2 C2.2 C3.1 C4.1 C5.2 C7.2 C8.1 C9.1 C10.2 C11.1 C13.1 C14.2 C15.1 C17.2 C18.1 C19.2 C20.2 C21.1 C22.1 C23.2 C24.2 C25.2 C26.2 C27.2 C28.1 C29.1 C30.2 C31.2 C32.1 C33.1 C34.2 C35.2 C36.1 C38.1 C40.2 C41.2 C42.1 C45.1 C47.2 C48.2 C49.2 C50.2 C52.2 D2.2 D3.1 D3.3 D4.1 D4.3 D6.2 J2.4 J11.5 P1.2 P3.4 P3.5 P3.6 P5.2 P6.2 P7.8 P8.4 P9.2 P10.6 P10.7 P11.1 P13.8 P13.9 P13.10 P13.11 P13.12 P14.4 P15.4 P16.4 P17.4 P18.4 P19.4 Q2.2 Q3.1 R7.2 R14.2 R16.1 R18.2 R24.1 R25.1 R27.1 R28.1 R41.2 R52.1 R62.2 R63.1 R90.2 S1.1 S1.4 U1.10 U1.27 U1.74 U1.99 U3.1 U4.1 U6.2 U8.15 U10.5 U11.1 U13.1 | length 166.7
  Top Layer w0.762: v1(152.781,21.66) 153.013,21.427 153.013,20.699 ; v1(166.992,44.158) v1(167.64,44.806) ; v1(170.104,51.359) 171.501,52.756 171.501,52.908
  Bottom Layer w0.254: v1(54.635,3.048) 54.661,3.023 R62.2@55.857,3.023 ; R24.1@68.138,2.159 69.164,3.185 v1(69.164,5.436) ; v1(72.06,3.15) 73.025,2.184 R28.1@74.132,2.184 ; C9.1@72.517,54.854 74.204,54.854 74.524,54.534 v1(74.524,53.67) 74.549,53.645 U10.5@76.321,53.645 ; v1(77.927,3.15) 78.893,2.184 R16.1@79.797,2.184 ; v1(84.999,23.216) R14.2@86.594,23.216 ; v1(129.261,44.407) R7.2@129.261,45.949 ; C47.2@136.019,46.126 v1(136.019,48.59) ; C28.1@138.034,43.891 138.989,43.891 139.217,44.12 v1(139.217,44.907) ; v1(138.709,30.13) 138.73,30.15 C23.2@140.061,30.15 140.071,30.16 R41.2@140.071,32.094 ; v1(138.887,24.801) 138.898,24.79 C24.2@140.061,24.79 ; v1(143.434,30.404) 144.806,30.404 C52.2@146.406,28.804 ; v1(144.635,19.787) 144.65,19.802 C20.2@146.456,19.802 ; v1(145.994,37.719) 146.014,37.739 C4.1@146.014,38.887 C3.1@146.014,40.767 ; C27.2@146.406,24.323 147.203,25.121 v1(147.93,25.121) ; v1@147.98,25.07 148.665,25.754 U1.10@150.463,25.754 ; v1(149.941,37.287) 149.941,38.547 C1.2@150.282,38.887 ; v1@150.038,37.191 150.881,36.348 152.273,36.348 152.513,36.107 U1.27@152.513,34.804 ; C26.2@151.602,17.043 152.513,17.954 U1.99@152.513,19.704 152.513,21.392 v1(152.781,21.66) ; R25.1@156.794,12.781 156.939,12.781 157.855,11.865 158.585,11.865 159.298,11.152 v1(159.298,6.833) ; U1.74@165.563,21.754 167.183,21.754 167.972,20.965 C25.2@168.935,20.965 ; v1(174.193,17.919) U6.2@175.451,17.919 ; v1(174.396,33.02) 174.727,32.69 U8.15@175.772,32.69 ; v1(182.397,37.196) C42.1@183.885,37.196
  Bottom Layer w0.762: v1(60.477,14.666) 60.513,14.63 Q2.2@62.509,14.63 ; R27.1@63.729,18.456 C33.1@65.761,18.456 ; v1(65.761,17.145) C33.1@65.761,18.456 ; C33.1@65.761,18.466 C33.1@65.761,18.456 ; C35.2@67.894,18.491 67.859,18.456 C33.1@65.761,18.456 ; v1(72.06,17.145) C36.1@72.06,18.481 ; v1(76.124,6.679) v1(76.124,9.474) ; R18.2@86.06,43.231 86.06,44.836 v1(86.106,44.882) ; C7.2@100.228,63.129 102.481,63.129 P3.6@103.97,64.618 ; v1(134.569,17.272) 134.889,16.952 C32.1@134.889,15.911 ; C31.2@136.896,18.212 139.385,18.212 C21.1@140.071,18.898 C22.1@140.071,20.777 ; C29.1@139.715,8.407 137.683,8.407 C30.2@136.896,9.195 136.896,9.362 138.67,11.137 U11.1@140.041,11.137 ; C49.2@164.338,40.726 164.338,42.078 v1(164.363,42.103) ; C40.2@165.278,50.058 165.278,51.359 v1(165.252,51.384) 164.694,51.943 164.694,52.654 165.659,53.619 P6.2@165.659,55.448 ; v1(166.294,42.078) 166.345,42.027 C2.2@166.345,40.726 ; v1(166.992,44.158) v1(167.64,44.806) 168.833,45.999 v1(168.833,47.676) v1(168.833,48.552) ; C48.2@168.986,17.12 v1(170.434,17.12) ; C50.2@169.85,24.547 171.516,24.547 J2.4@172.364,23.698 172.644,23.978 v1(176.53,23.978) 176.921,23.586 C8.1@176.921,22.377 177.582,21.717 178.539,21.717 179.708,22.885 v1(180.289,22.885) ; v1(170.104,51.359) 170.18,51.283 C41.2@170.18,50.038 ; C38.1@179.207,35.839 180.645,35.839 v1(180.67,35.865) ; C45.1@183.808,22.824 185.887,22.824 v1(185.903,22.809) 185.939,22.772 R90.2@185.939,21.321 ; 184.473,45.796 184.473,48.05 v1(184.48,48.057) ; R52.1@186.832,26.708 186.832,25.309 v1(186.842,25.298) ; R63.1@186.883,38.735 186.883,37.297 v1(186.919,37.262) 186.919,36.652 187.401,36.17 189.59,36.17 J11.5@191.22,37.799
  Bottom Layer w1.27: v1(55.905,18.44) C34.2@57.495,18.44 ; C15.1@84.938,36.281 84.938,37.821 v3(84.963,37.846) ; C13.1@120.914,3.175 120.914,4.978 C14.2@122.718,6.782 ; v3(129.464,20.98) 129.464,21.023 129.472,21.031 D3.1@129.472,19.355 ; D3.3@129.472,14.275 129.472,12.818 129.489,12.802 v3(129.489,12.791) ; D4.3@129.726,35.179 129.726,33.469 v3(129.743,33.452) ; D4.1@129.726,40.259 129.726,42.139 v3(129.743,42.139)
  Bottom Layer w2.032: C18.1@121.514,24.105 121.514,26.761 C19.2@122.718,27.965
  other v1: 167.462,21.615 133.655,59.868 137.835,59.893 132.817,60.789 134.468,60.789 137.287,60.789 138.582,60.789
I_SENSE: R1.1 U1.32 | length 86.5
  Top Layer w0.254: v1(130.734,44.399) 132.212,42.921 v1(145.136,42.921)
  Bottom Layer w0.254: R1.1@85.496,54.712 85.496,53.721 85.827,53.391 128.803,53.391 130.531,51.664 130.531,48.489 131.547,47.473 131.547,45.212 v1(130.734,44.399) ; v1(145.136,42.921) 152.637,42.921 154.445,41.113 154.445,36.652 155.013,36.084 U1.32@155.013,34.804
IIC2_SCL: R50.1 U1.47 U13.3 | length 32.9
  Top Layer w0.254: v1(164.338,44.958) 165.938,46.558 v1(171.323,46.558)
  Bottom Layer w0.254: U1.47@162.513,34.804 162.559,34.849 162.559,43.179 v1(164.338,44.958) ; v1(171.323,46.558) 175.184,46.558 175.895,45.847 178.029,45.847 178.511,46.33 178.511,48.044 R50.1@178.58,48.113 181.402,48.113 181.933,47.581 181.933,46.324
IIC2_SDA: R51.1 U1.48 U13.4 | length 35.2
  Top Layer w0.254: v1(164.363,43.383) 166.964,45.984 170.602,45.984 170.993,45.593 v1(172.237,45.593) 172.872,44.958 175.514,44.958 176.472,45.916 v1(176.472,46.711)
  Bottom Layer w0.254: U1.48@163.013,34.804 163.013,42.033 v1(164.363,43.383) ; v1(172.237,45.593) 174.879,45.593 175.514,44.958 180.34,44.958 180.663,45.281 180.663,46.324 ; v1(176.472,46.711) R51.1@176.472,48.113
IR1A: R33.2 R70.2 U1.43 | length 45.8
  Top Layer w0.254: v1(159.969,45.009) 159.969,47.574 164.694,52.299 v1(165.938,52.299)
  Bottom Layer w0.254: v1(159.969,45.009) 160.513,44.465 U1.43@160.513,34.804 ; v1(165.938,52.299) 166.679,52.299 168.554,54.174 168.554,57.15 170.104,58.699 176.708,58.699 177.216,59.207 R70.2@177.216,60.086 176.261,60.086 176.047,60.3 176.047,65.151 177.282,66.385 R33.2@177.282,66.65
IR1B: R32.2 R71.2 U1.44 | length 46.7
  Top Layer w0.254: v1(160.909,45.923) 160.909,47.295 163.897,50.282 165.548,50.282 v1(166.649,51.384)
  Bottom Layer w0.254: v1(160.909,45.923) 161.013,45.819 U1.44@161.013,34.804 ; v1(166.649,51.384) 169.037,53.772 169.037,56.906 170.271,58.141 178.765,58.141 179.349,58.725 179.349,60.076 179.446,60.173 180.34,60.173 180.569,60.401 180.569,62.967 181.168,63.566 R32.2@181.168,66.65
IR2A: R31.2 R72.2 U1.45 | length 48.3
  Top Layer w0.254: v1(161.874,45.009) 161.874,46.812 164.617,49.555 166.192,49.555 v1(168.021,51.384)
  Bottom Layer w0.254: U1.45@161.513,34.804 161.513,44.648 v1(161.874,45.009) ; v1(168.021,51.384) 169.535,52.898 169.535,56.723 170.419,57.607 179.309,57.607 R72.2@181.788,60.086 182.692,60.086 182.982,60.376 182.982,62.948 183.617,63.583 183.617,65.222 R31.2@185.044,66.65
IR2B: R29.2 R73.2 U1.46 | length 51.9
  Top Layer w0.254: v1(162.89,45.888) 162.89,46.787 164.846,48.743 166.395,48.743 170.282,52.629 v1(170.282,53.543)
  Bottom Layer w0.254: U1.46@162.013,34.804 162.013,43.853 162.89,44.729 v1(162.89,45.888) ; v1(170.282,53.543) 170.282,56.54 170.739,56.998 179.629,56.998 181.102,58.471 183.49,58.471 184.175,59.157 R73.2@184.175,60.086 186.578,60.086 188.93,62.438 R29.2@188.93,66.65
JTDI: R93.2
JTDO_SWO: R92.2
JTRST: R91.2
LED_ERR: R22.2 U1.98 | length 43.4
  Top Layer w0.254: v1(145.948,5.918) 147.93,7.899 147.93,8.738 148.412,9.22 150.089,9.22 150.774,9.906 150.774,16.026 148.665,18.136 148.665,21.03 v1(152.781,25.146)
  Bottom Layer w0.254: R22.2@134.239,4.542 135.87,6.172 145.694,6.172 v1(145.948,5.918) ; v1(152.781,25.146) 153.67,24.257 153.67,21.355 153.013,20.699 U1.98@153.013,19.704
LED_RUN: R17.2 U1.97 | length 24.5
  Top Layer w0.254: v1(146.761,4.572) 146.761,5.69 148.742,7.671 154.076,7.671 155.829,9.423 155.829,13.887 153.543,16.173 v1(153.543,17.577)
  Bottom Layer w0.254: R17.2@145.186,4.572 v1(146.761,4.572) ; U1.97@153.513,19.704 153.513,17.606 v1(153.543,17.577)
NetC12_1: C12.1 U3.4 | length 2.8
  Bottom Layer w1.016: U3.4@88.544,14.635 91.332,14.635 C12.1@91.338,14.641
NetC13_2: C13.2 C14.1 L1.2 R9.2 R13.1 | length 34.4
  Top Layer w0.762: v1(103.81,23.216) 106.35,25.756 110.109,25.756 111.658,24.206 111.658,15.07 L1.2@108.61,12.022
  Bottom Layer w0.762: R13.1@92.39,23.216 v1(103.81,23.216)
NetC16_1: C16.1 U4.4 | length 2.7
  Bottom Layer w0.762: U4.4@88.214,34.751 90.799,34.751 C16.1@90.856,34.808
NetC18_2: C18.2 C19.1 L2.2 R12.2 R15.1 | length 65.1
  Top Layer w0.762: v1(103.581,43.231) 107.34,46.99 110.236,46.99 111.862,45.364 111.862,36.33 L2.2@108.814,33.282
  Bottom Layer w0.762: R15.1@91.857,43.231 91.907,43.18 91.958,43.231 v1(103.581,43.231)
  Bottom Layer w2.032: L2.2@108.814,33.282 114.13,27.965 C19.1@117.718,27.965 118.821,27.965 ; C18.2@118.821,24.143 118.821,27.965 ; R12.2@127.152,25.578 127.152,28.753 125.247,30.658 121.514,30.658 118.821,27.965
NetC21_2: C21.2 U1.8 | length 11.8
  Bottom Layer w0.254: C21.2@141.971,18.898 143.111,18.898 143.441,19.228 143.441,20.81 145.415,22.784 147.6,22.784 149.525,24.709 150.418,24.709 U1.8@150.463,24.754
NetC22_2: C22.2 U1.9 | length 10.3
  Bottom Layer w0.254: C22.2@141.971,20.777 141.981,20.788 142.773,20.788 145.201,23.216 147.269,23.216 149.308,25.254 U1.9@150.463,25.254
NetC23_1: C23.1 R21.1 U1.13 Y2.1 | length 11.2
  Bottom Layer w0.254: C23.1@141.961,30.15 R21.1@141.961,28.382 143.647,28.382 Y2.1@144.171,28.906 145.391,27.686 148.541,27.686 148.973,27.254 U1.13@150.463,27.254
NetC24_1: C24.1 R21.2 U1.12 Y2.2 | length 11.3
  Bottom Layer w0.254: C24.1@141.961,24.79 R21.2@141.961,26.482 143.495,26.482 Y2.2@144.171,25.806 ; Y2.2@144.171,25.819 145.606,27.254 148.362,27.254 148.862,26.754 U1.12@150.463,26.754
NetC28_2: C28.2 D8.1 R30.1 R35.2 S1.2 S1.3 | length 18.8
  Top Layer w0.254: v1(135.026,47.953) 135.259,47.721 S1.2@135.259,46.128 ; S1.3@135.259,39.928 135.259,41.381 135.687,41.808 v1(137.516,41.808)
  Bottom Layer w0.254: v1@135.005,47.932 135.005,44.12 135.234,43.891 C28.2@136.134,43.891 D8.1@136.134,41.808 ; R30.1@136.058,37.44 136.058,39.563 R35.2@136.068,39.573 136.134,39.639 D8.1@136.134,41.808 ; D8.1@136.068,41.808 D8.1@136.134,41.808 ; v1(137.516,41.808) D8.1@136.134,41.808
NetC35_1: C35.1 R23.2 U5.3 | length 10
  Bottom Layer w0.254: R23.2@69.987,20.391 R23.2@70.002,20.406
  Bottom Layer w0.762: U5.3@65.71,27.404 65.71,23.622 67.894,21.438 C35.1@67.894,20.391 R23.2@69.987,20.391
NetC37_1: C37.1 U8.1 | length 3.5
  Bottom Layer w0.254: U8.1@180.772,33.96 181.737,33.96 182.707,32.99 C37.1@183.885,32.99
NetC37_2: C37.2 U8.3 | length 3.2
  Bottom Layer w0.254: U8.3@180.772,31.42 181.915,31.42 182.245,31.09 C37.2@183.885,31.09
NetC39_1: C39.1 U8.4 | length 3.8
  Bottom Layer w0.254: U8.4@180.772,30.15 181.94,30.15 182.448,29.642 182.448,29.312 ; 182.449,29.312 182.845,28.915 C39.1@183.859,28.915
NetC39_2: C39.2 U8.5 | length 3.9
  Bottom Layer w0.254: U8.5@180.772,28.88 181.839,28.88 183.703,27.015 C39.2@183.859,27.015
NetC42_2: C42.2 U8.2 | length 7.6
  Bottom Layer w0.254: U8.2@180.772,32.69 179.781,32.69 179.426,33.045 179.426,34.249 179.822,34.646 181.864,34.646 182.514,35.296 C42.2@183.885,35.296
NetC45_2: C45.2 U8.6 | length 5.5
  Bottom Layer w0.254: U8.6@180.772,27.61 182.067,27.61 182.347,27.33 182.347,25.146 182.768,24.724 C45.2@183.808,24.724
NetC49_1: C49.1 U1.49 | length 4.4
  Bottom Layer w0.254: U1.49@163.513,34.804 163.513,36.488 164.326,37.301 164.326,38.815 C49.1@164.338,38.826
NetC50_1: C50.1 U1.73 | length 4.4
  Bottom Layer w0.254: U1.73@165.563,22.254 166.958,22.254 167.297,22.593 169.796,22.593 C50.1@169.85,22.647
NetC51_1: C51.1 R40.1 U1.21 U1.22 | length 13.2
  Bottom Layer w0.254: R40.1@141.976,34.202 142.404,34.63 C51.1@146.406,34.63 147.64,34.63 148.717,33.553 148.717,32.225 ; U1.21@150.463,31.254 149.041,31.254 148.717,31.578 148.717,32.225 ; U1.22@150.463,31.754 149.188,31.754 148.717,32.225